# Altium PCB Power Selection.PcbDoc (part 2 of 2)
Units mm, origin at the board's own origin, x right, y up, seen from the top; angles counter-clockwise.
Board outline 152.4 x 101.6 mm, 4 copper layers (Top Layer, Ground, Signal, Bottom Layer), stack 0.777 mm thick; 134 components, 65 nets, 477 pads, 42 vias.
Unrouted connection lines stored in the file: 244.
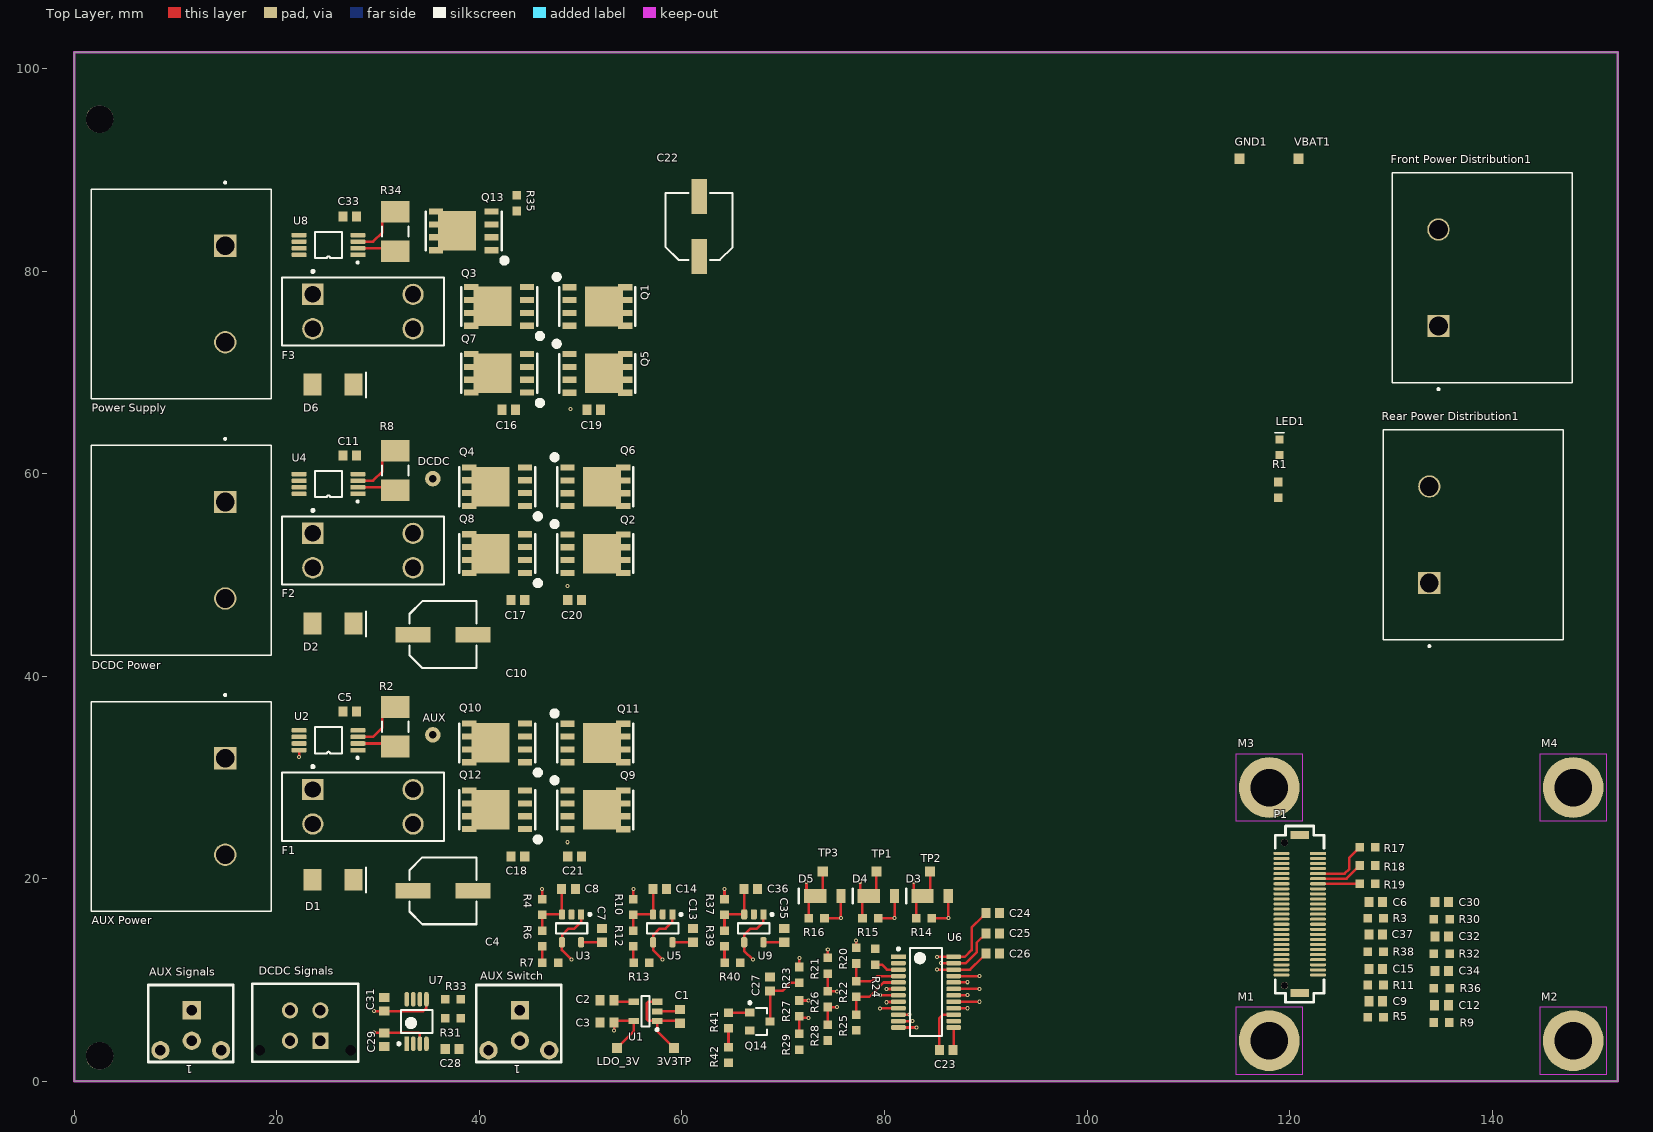
[diagram p0: Top Layer view]

## Part data (continued)
R27: "44.2 kOhms ±1% 0.1W, 1/10W Chip Resistor 0603 (1608 Metric) Automotive AEC-Q200 Thick Film", Power (Watts)=1/10W, Resistance="44.2 k", Supplier Part Number 1=P44.2KHCT-ND, ComponentLink1Description=https://industrial.panasonic.com/cdbs/www-data/pdf/RDA0000/AOA0000C304.pdf, ComponentLink1URL=https://industrial.panasonic.com/cdbs/www-data/pdf/RDA0000/AOA0000C304.pdf, Supplier 1=Digi-Key
R28: "76.8 kOhms ±1% 0.1W, 1/10W Chip Resistor 0603 (1608 Metric) Automotive AEC-Q200 Thick Film", Power (Watts)=1/10W, Resistance="76.8 k", Supplier Part Number 1=RMCF0603FT76K8CT-ND, ComponentLink1Description=https://www.seielect.com/catalog/sei-rmcf_rmcp.pdf, ComponentLink1URL=https://www.seielect.com/catalog/sei-rmcf_rmcp.pdf, Supplier 1=Digi-Key
R41: library part CMP-010-0039-1, "1 kOhms ��0.1% 0.1W, 1/10W Chip Resistor 0603 (1608 Metric) Automotive AEC-Q200 Thin Film", Case Code (Metric)=1608, Case/Package=0603, Manufacturer=Panasonic, Manufacturer Part Number=ERA3AEB103V, Max Operating Temperature=155��C, Max Power Dissipation=100mW, Min Operating Temperature=-55��C, Package Quantity=5000, Temperature Coefficient=25ppm/��C, Tolerance=0.1%, Voltage Rating=75V, ComponentLink1Description=Digikey, ComponentLink1URL=https://www.digikey.ca/product-detail/en/panasonic-electronic-components/ERA-3AEB102V/P1.0KDBCT-ND/1466052, ComponentLink2Description=http://www.farnell.com/datasheets/485442.pdf, ComponentLink2URL=http://www.farnell.com/datasheets/485442.pdf, ComponentLink3Description=http://industrial.panasonic.com/www-data/pdf/AOA0000/AOA0000CE26.pdf, ComponentLink3URL=http://industrial.panasonic.com/www-data/pdf/AOA0000/AOA0000CE26.pdf, ComponentLink4Description=http://www.farnell.com/datasheets/2052875.pdf, ComponentLink4URL=http://www.farnell.com/datasheets/2052875.pdf, ComponentLink5Description=http://www.farnell.com/datasheets/1776116.pdf, ComponentLink5URL=http://www.farnell.com/datasheets/1776116.pdf, ComponentLink6Description=http://uk.rs-online.com/webdocs/148c/0900766b8148c4ab.pdf, ComponentLink6URL=http://uk.rs-online.com/webdocs/148c/0900766b8148c4ab.pdf, ComponentLink7Description=http://www.farnell.com/datasheets/2059650.pdf, ComponentLink7URL=http://www.farnell.com/datasheets/2059650.pdf, ComponentLink8Description=http://www.produktinfo.conrad.com/datenblaetter/450000-474999/451250-da-01-en-WIDERSTAND_0603_ERA.pdf, ComponentLink8URL=http://www.produktinfo.conrad.com/datenblaetter/450000-474999/451250-da-01-en-WIDERSTAND_0603_ERA.pdf, Composition="Metal Film,Thin Film", Contact Plating=Tin, Depth=0.8mm, Design Item ID="RES SMD 1K OHM 0.1% 1/10W 0603", Height=0.45mm, Lead Free="Lead Free", Length=1.6mm, Military Standard=Not, Mount="Surface Mount", Number of Terminations=2, Packaging="Tape and Reel", Pins=2, Power Rating=100mW, Pricing 1="1 = 0.35000, 10 = 0.30000, 100 = 0.11720, 1000 = 0.04906, 2500 = 0.04498 (USD)", Radiation Hardening=No, REACH SVHC="No SVHC", RoHS=Yes, Source="Schematic Diagrams.SchLib", Stock 1=2747820, Termination=SMD/SMT, Voltage Rating (DC)=75V, Width=0.8mm
U1: "Linear Voltage Regulator IC 1 Output 200mA SOT-23-5", Supplier Part Number 1=296-12159-1-ND, ComponentLink1Description=https://media.digikey.com/pdf/Data%20Sheets/Texas%20Instruments%20PDFs/TPS793_Rev2015.pdf, ComponentLink1URL=https://media.digikey.com/pdf/Data%20Sheets/Texas%20Instruments%20PDFs/TPS793_Rev2015.pdf, Supplier 1=Digi-Key
U2 U4 U8: library part "IC CURRENT AMPLIFIER INA240 8-TSSOP", "Current Sense Amplifier 1 Circuit 8-TSSOP", Current - Supply=1.8mA, Manufacturer 1="Texas Instruments", Manufacturer Part Number 1=INA240A3PWR, Operating Temperature="-40°C ~ 125°C", Package / Case="8-TSSOP (0.173\", 4.40mm Width)", Supplier Device Package=8-TSSOP, Supplier Part Number 1=296-45090-1-ND, Voltage - Supply, Single/Dual (±)="2.7 V ~ 5.5 V", Amplifier Type="Current Sense", Category="Integrated Circuits (ICs)", ComponentLink1Description=http://www.ti.com/lit/ds/symlink/ina240.pdf, ComponentLink1URL=http://www.ti.com/lit/ds/symlink/ina240.pdf, Description 1="IC AMP CURRENT SENSE 8-TSSOP", Mounting Type="Surface Mount", Output Type=-, Packaging="Cut Tape (CT)", Part Status=Active, Pricing 1="1=3.79, 10=3.397, 100=2.7311, 500=2.24388, 1000=1.85921 (CAD)", RoHS="RoHS Compliant", Slew Rate="2 V/µs", Stock 1=1286, Supplier 1=Digi-Key
U3 U5 U9: "General Purpose Amplifier 1 Circuit Rail-to-Rail SOT-23-5", Current - Output / Channel=50mA, Current - Supply=400µA, Manufacturer 1="Texas Instruments", Manufacturer Part Number 1=TLV316QDBVRQ1, Operating Temperature="-40°C ~ 125°C", Package / Case="SC-74A, SOT-753", Supplier Device Package=SOT-23-5, Supplier Part Number 1=296-45323-1-ND, Voltage - Supply, Single/Dual (±)="1.8 V ~ 5.5 V, ±0.9 V ~ 2.75 V", -3db Bandwidth=-, Amplifier Type="General Purpose", Category="Integrated Circuits (ICs)", ComponentLink1Description=http://www.ti.com/lit/ds/symlink/tlv316-q1.pdf, ComponentLink1URL=http://www.ti.com/lit/ds/symlink/tlv316-q1.pdf, Description 1="IC OP AMP GP RR 10MHZ 5-SOT-23", Mounting Type="Surface Mount", Number of Circuits=1, Output Type=Rail-to-Rail, Packaging="Cut Tape (CT)", Part Status=Active, Pricing 1="1=1.33, 10=1.185, 100=0.9234, 500=0.76276, 1000=0.60218 (CAD)", RoHS="RoHS Compliant", Slew Rate="6 V/µs", Stock 1=1747, Supplier 1=Digi-Key
U6: "OR Controller Source Selector Switch P-Channel 3:1 24-SSOP", Current - Output (Max)=-, Current - Supply=28µA, Manufacturer 1="Linear Technology", Manufacturer Part Number 1=LTC4417CGN#PBF, Operating Temperature="0°C ~ 70°C", Package / Case="24-SSOP (0.154\", 3.90mm Width)", Supplier Device Package=24-SSOP, Supplier Part Number 1=LTC4417CGN#PBF-ND, Voltage - Supply="2.5 V ~ 36 V", ComponentLink1Description=http://www.linear.com/docs/42408, ComponentLink1URL=http://www.linear.com/docs/42408, FET Type=P-Channel, Internal Switch(s)=No, Mounting Type="Surface Mount", Packaging=Tube, Part Status=Active, Ratio - Input:Output=3:1, Supplier 1=Digi-Key, Type="Source Selector Switch"
U7: "General Purpose Amplifier 2 Circuit Rail-to-Rail 8-VSSOP", Case/Package=VSSOP, Input Bias Current=5pA, Input Offset Voltage (Vos)=250uV, Manufacturer="Texas Instruments", Manufacturer Part Number=OPA2197IDGKR, Max Operating Temperature=125°C, Min Operating Temperature=-40°C, Operating Supply Current=1mA, Output Current per Channel=65mA, Supplier Part Number 1=296-47349-1-ND, ComponentLink1Description=http://www.ti.com/lit/ds/symlink/opa2197.pdf, ComponentLink1URL=http://www.ti.com/lit/ds/symlink/opa2197.pdf, Gain Bandwidth Product=10MHz, Lead Free="Lead Free", Mount="Surface Mount", Number of Channels=2, Number of Circuits=2, Packaging="Tape and Reel", Pricing 1="1=2.41, 10=2.162, 100=1.7376, 500=1.4276, 1000=1.1829 (USD)", Slew Rate=20V/µs, Stock 1=2171, Supplier 1=Digi-Key

## Free pads (board coordinates)
  round 2.7 hole 2.7: ""(2.5,2.5) ""(2.5,95)

## Via types
v1: diameter 0.4, hole 0.2, Top Layer to Bottom Layer, tented both sides, 25 vias
v2: diameter 0.4, hole 0.2, Top Layer to Bottom Layer, 17 vias

## Nets (pads, with @x,y where several pads share a name; then routed paths per layer and width w, separated by ;. In a path a pad name is that pad's centre, name@x,y a point inside that pad or via, vN(x,y) a via of type N, cw(c..) or ccw(c..) an arc to the next point about the centre after c; other vN are vias at no path point)
3V3: 3V3TP.TP C1.1 P1.40 P1.41 P1.42 P1.43 P1.44 P1.45 R17.1 R18.1 R19.1 U1.1 U1.3 | length 9.4
  Top Layer w0.254: U1.3 56.698,7.852 56.549,7.703 56.549,6.1 56.698,5.952 U1.1 ; 3V3TP.TP 57.55,4.95 U1.1 ; C1.1 59.573,5.952 U1.1
AUX_BAT_IN: "AUX Power.1" D1.1 F1.1 F1.2 R4.1 | length 26.3
  Top Layer w0.254: R4.1 v1(46.2,19)
  Signal w0.254: F1.2 29.95,19 v1(46.2,19)
AUX_FUSED: AUX.TH_TP C26.1 Q10.5 Q10.6 Q10.7 Q10.8 Q12.5 Q12.6 Q12.7 Q12.8 R2.2 R23.1 U2.3 U6.22 | length 26
  Top Layer w0.254: U2.3 29.5,34 30.427,34.927 30.427,36.002 31.375,36.95 R2.2 ; R23.1 v1(71.6,12.175) ; v1(85.2,11.019) 86.797,11.019 U6.22@86.8,11.022 ; U6.22 88.448,11.022 89.652,12.227 89.702,12.227 90.025,12.55 C26.1
  Signal w0.254: v1(71.6,12.175) 80.525,12.175 81.681,11.019 v1(85.2,11.019)
DCDC_FUSED: C25.1 DCDC.TH_TP Q4.5 Q4.6 Q4.7 Q4.8 Q8.5 Q8.6 Q8.7 Q8.8 R8.2 R21.1 U4.3 U6.23 | length 24.4
  Top Layer w0.254: U4.3 29.5,59.3 30.427,60.227 30.427,61.302 31.375,62.25 R8.2 ; R21.1 v1(74.4,13.025) ; v2(85.6,11.657) 88.031,11.657 89.1,12.727 89.1,13.675 C25.1
  Signal w0.254: v1(74.4,13.025) 80.827,13.025 82.195,11.657 v2(85.6,11.657)
DCDC_UNFUSED: "DCDC Power.1" D2.1 F2.1 F2.2 R10.1 | length 60.2
  Top Layer w0.254: R10.1 v1(55.2,19)
  Signal w0.254: F2.2 25.2,49.05 25.2,24.4 30,19.6 46.422,19.6 47.022,19 v1(55.2,19)
GND: "AUX Power.2" "AUX Switch.2" "DCDC Power.2" "DCDC Signals.2" "Front Power Distribution1.2" "Power Supply.2" "Rear Power Distribution1.2" C1.2 C2.2 C3.2 C4.2 C5.2 C6.2 C7.2 C8.2 C9.2 C10.2 C11.2 C12.2 C13.2 C14.2 C15.2 C16.2 C17.2 C18.2 C22.2 C23.2 C24.2 C25.2 C26.2 C27.2 C28.2 C29.2 C30.2 C31.2 C32.2 C33.2 C34.2 C35.2 C36.2 C37.2 D1.2 D2.2 D6.2 GND1.TP LED1.2 P1.1 P1.2 P1.3 P1.4 P1.26 P1.27 P1.28 P1.29 Q14.2 R7.2 R13.2 R24.2 R25.1 R28.2 R29.2 R31.2 R33.2 R35.2 R40.2 R42.2 U1.2 U2.1 U2.4 U2.6 U2.7 U3.2 U4.1 U4.4 U4.6 U4.7 U5.2 U6.13 U7.4 U8.1 U8.4 U8.6 U8.7 U9.2 | length 4.6
  Top Layer w0.254: U1.2 57.552,6.9 59.625,6.9 C1.2 ; C23.2 86.825,3.15 U6.13
LDO_3V: "AUX Signals.2" "DCDC Signals.1" C3.1 C5.1 C7.1 C11.1 C13.1 C28.1 C33.1 C35.1 LDO_3V.TP U1.5 U2.5 U3.5 U4.5 U5.5 U7.8 U8.5 U9.5 | length 12.3
  Top Layer w0.254: U3.5 C7.1 ; v2(53.3,5) 53.3,5.775 C3.1 53.427,5.952 U1.5 55.25,4.95 LDO_3V.TP ; U5.5 C13.1 ; U9.5 C35.1
"NetAUX Signals_1": "AUX Signals.1" C31.1 R33.1 U7.5 | length 25.5
  Top Layer w0.254: v2(29.6,6.925) C31.1 34.443,6.925 34.766,7.249 34.766,8.091 U7.5
  Signal w0.254: 11.6,7 13.2,8.6 27.925,8.6 v2(29.6,6.925)
"NetAUX Switch_1": "AUX Switch.1" R41.1 R42.1 | length 1.9
  Top Layer w0.254: R42.1 R41.1
NetC2_1: C2.1 U1.4 | length 2
  Top Layer w0.254: C2.1 53.423,7.852 U1.4
NetC4_1: C4.1 F1.3 F1.4 R2.1 U2.2 | length 3.8
  Top Layer w0.254: U2.2 31.4,33.35 R2.1
NetC8_1: C8.1 R4.2 R6.1 U3.3 | length 6.1
  Top Layer w0.254: R6.1 R4.2 46.25,16.475 U3.3 48.15,18.975 C8.1
NetC10_1: C10.1 F2.3 F2.4 R8.1 U4.2 | length 3.8
  Top Layer w0.254: U4.2 31.4,58.65 R8.1
NetC14_1: C14.1 R10.2 R12.1 U5.3 | length 6.1
  Top Layer w0.254: R12.1 R10.2 55.25,16.475 U5.3 57.15,18.975 C14.1
NetC27_1: C27.1 Q14.3 R23.2 R27.1 U6.8 | length 17
  Top Layer w0.254: Q14.3 C27.1 69.925,8.925 70.725,9.725 R23.2 ; R27.1 v1(72.5,7.975) ; v1(80.184,7.8) 80.208,7.824 81.326,7.824 U6.8@81.35,7.847
  Signal w0.254: v1(72.5,7.975) 72.525,7.975 73.756,6.744 75.541,6.744 76.597,7.8 v1(80.184,7.8)
NetC29_1: "DCDC Signals.3" C29.1 R31.1 U7.3 | length 14.7
  Top Layer w0.254: v2(29.6,4.8) 33.976,4.8 34.125,4.651 U7.3
  Signal w0.254: 21.3,4 22.8,5.5 28.9,5.5 v2(29.6,4.8)
NetC36_1: C36.1 R37.2 R39.1 U9.3 | length 6.1
  Top Layer w0.254: R39.1 R37.2 64.25,16.475 U9.3 66.15,18.975 C36.1
NetD3_1: D3.1 R14.2 U6.20 | length 12.3
  Top Layer w0.254: R14.2 v1(86.3,16.1) D3.1 ; U6.20 86.849,9.776 v2(88.2,9.776)
  Signal w0.254: v1(86.3,16.1) 88.2,14.2 v2(88.2,9.776)
NetD4_1: D4.1 R15.2 U6.18 | length 18.3
  Top Layer w0.254: R15.2 v2(81,16.1) D4.1 ; U6.18 86.834,8.491 88.191,8.491 v2(88.2,8.5) v2@88.276,8.5
  Signal w0.254: v2(81,16.1) 85.1,16.1 87.6,13.6 87.6,9.1 v2(88.2,8.5)
NetD5_1: D5.1 R16.2 U6.16 | length 24.2
  Top Layer w0.254: R16.2 v1(75.7,16.1) D5.1 ; U6.16 86.831,7.206 v2(88.2,7.206)
  Signal w0.254: v1(75.7,16.1) 79.8,16.1 80.5,15.4 84.8,15.4 87.1,13.1 87.1,8.306 v2(88.2,7.206)
NetF3_3: F3.3 F3.4 R34.1 U8.2 | length 3.8
  Top Layer w0.254: U8.2 31.4,82.25 R34.1
NetLED1_1: LED1.1 R1.2
NetQ13_4: Q13.4 R35.1
NetQ13_5: Q13.5 Q13.6 Q13.7 Q13.8 R34.2 U8.3 | length 5.6
  Top Layer w0.254: U8.3 29.5,82.9 30.427,83.827 30.427,84.902 31.375,85.85 R34.2
NetQ14_1: Q14.1 R41.2 | length 2.1
  Top Layer w0.254: R41.2 66.675,6.775 Q14.1
NetR3_1: R3.1 U2.8 | length 0.7
  Top Layer w0.254: v1(22.2,32) U2.8
NetR5_1: R5.1 U3.1 U3.4 | length 47.6
  Top Layer w0.254: v1(49.1,12) 48.15,12.95 U3.4 48.182,13.757 48.182,14.436 48.821,15.075 49.378,15.075 50.046,15.743 50.046,16.471 U3.1
  Signal w0.254: v1(49.1,12) 55.5,12 57.5,10 80.6,10 81.7,8.9 87.2,3.4
NetR6_2: R6.2 R7.1 | length 1.6
  Top Layer w0.254: R6.2 46.2,11.725 R7.1
NetR9_1: R9.1 U4.8
NetR11_1: R11.1 U5.1 U5.4 | length 37.7
  Top Layer w0.254: v1(58.1,12) 57.15,12.95 U5.4 57.171,13.746 57.171,14.446 57.8,15.075 58.375,15.075 59.043,15.743 59.043,16.468 U5.1
  Signal w0.254: v1(58.1,12) 64.47,12 65.67,10.8 80.526,10.8 86.726,4.6
NetR12_2: R12.2 R13.1 | length 1.6
  Top Layer w0.254: R12.2 55.2,11.725 R13.1
NetR20_2: R20.2 R22.1 U6.4 | length 6.1
  Top Layer w0.254: R20.2 R22.1 77.2,9.875 78.775,9.875 79.287,10.387 U6.4
NetR21_2: R21.2 R26.1 U6.6 | length 8.8
  Top Layer w0.254: R21.2 R26.1 v1(75.3,8.875) ; v1(80.179,9.104) 80.184,9.109 81.341,9.109 U6.6@81.35,9.117
  Signal w0.254: v1(75.3,8.875) 75.529,9.104 v1(80.179,9.104) 80.192,9.104 v1@80.204,9.104
NetR22_2: R22.2 R25.2 U6.5 | length 6.5
  Top Layer w0.254: R25.2 R22.2@77.2,8.325 ; R22.2 R22.2@77.2,8.325 ; U6.5 79.922,9.752 78.495,8.325 R22.2@77.2,8.325
NetR24_1: R24.1 U6.3 | length 2.5
  Top Layer w0.254: R24.1 79.74,11.517 80.235,11.022 U6.3
NetR26_2: R26.2 R28.1 U6.7 | length 9.2
  Top Layer w0.254: R28.1 R26.2 v1(75.3,7.325) ; v1(79.575,8.5) 79.584,8.491 81.341,8.491 U6.7@81.35,8.482
  Signal w0.254: v1(75.3,7.325) 76.475,8.5 v1(79.575,8.5) 79.587,8.5 v1@79.6,8.5
NetR27_2: R27.2 R29.1 U6.9 | length 12
  Top Layer w0.254: R29.1 R27.2 71.769,6.256 v1(72.5,6.256) ; v1(79.575,7.2) 79.581,7.206 81.344,7.206 U6.9@81.35,7.212
  Signal w0.254: v1(72.5,6.256) 75.953,6.256 76.897,7.2 v1(79.575,7.2) 79.587,7.2 v1@79.6,7.2
NetR30_1: R30.1 U7.1 U7.2
NetR32_1: R32.1 U7.6 U7.7
NetR36_1: R36.1 U8.8
NetR38_1: R38.1 U9.1 U9.4 | length 28.4
  Top Layer w0.254: v1(67,12) 66.15,12.85 U9.4 66.15,14.45 66.775,15.075 67.4,15.075 68.05,15.725 U9.1
  Signal w0.254: v1(67,12) 70.953,12 71.553,11.4 80.5,11.4 86.621,5.279
NetR39_2: R39.2 R40.1 | length 1.6
  Top Layer w0.254: R39.2 64.2,11.725 R40.1
PA0_AUX_VSENSE: C9.1 P1.25 R5.2
PA1_DCDC_VSENSE: C15.1 P1.24 R11.2
PA2_PWR_SUP_VSENSE: C37.1 P1.23 R38.2
PA3_AUX_ISENSE: C6.1 P1.22 R3.2
PA4_DCDC_ISENSE: C12.1 P1.21 R9.2
PA5_PWR_SUP_ISENSE: C34.1 P1.20 R36.2
PA6_AUX_TEMP: C32.1 P1.19 R32.2
PA7_DCDC_TEMP: C30.1 P1.18 R30.2
PA8_EN: P1.32 U6.1
PA8_V\A\L\I\D\3\: P1.7 R19.2 U6.12 | length 5.9
  Top Layer w0.254: U6.12@81.354,5.304 83.171,5.304 v1(83.175,5.3) ; P1.7 R19.2
PA9_V\A\L\I\D\2\: P1.6 R18.2 U6.11 | length 6.1
  Top Layer w0.254: U6.11@81.35,5.942 v1(82.775,5.942) ; P1.6 125.625,20 R18.2
PA10_V\A\L\I\D\1\: P1.5 R17.2 U6.10 | length 7
  Top Layer w0.254: U6.10@81.35,6.577 v1(82.475,6.577) ; P1.5 125.425,20.5 125.9,20.975 125.9,22.075 R17.2
PB0_DCDC_FAULT: "DCDC Signals.4" P1.17
PB15_S\H\D\N\: P1.8 U6.2
"Power Supply_UNFUSED": "Power Supply.1" D6.1 F3.1 F3.2 R37.1 | length 92.4
  Top Layer w0.254: R37.1 v1(64.2,19)
  Signal w0.254: F3.2 25.7,72.15 25.7,24.6 30.294,20.006 55.294,20.006 56.3,19 v1(64.2,19)
POWER_SUPLLY_FUSED: C24.1 Q3.5 Q3.6 Q3.7 Q3.8 Q7.5 Q7.6 Q7.7 Q7.8 Q13.1 Q13.2 Q13.3 R20.1 U6.24 | length 17.4
  Top Layer w0.254: R20.1 77.089,13.288 77.2,13.399 v1(77.2,13.9) ; v1(85.193,12.285) 85.2,12.292 U6.24 87.939,12.292 88.6,12.953 88.6,15.175 89.652,16.227 89.702,16.227 90.025,16.55 C24.1
  Signal w0.254: v1(77.2,13.9) 81.1,13.9 82.708,12.292 85.186,12.292 v1(85.193,12.285)
VBAT: "Front Power Distribution1.1" "Rear Power Distribution1.1" C19.2 C20.2 C21.2 C22.1 C23.1 P1.47 P1.48 P1.49 P1.50 Q1.5 Q1.6 Q1.7 Q1.8 Q2.5 Q2.6 Q2.7 Q2.8 Q5.5 Q5.6 Q5.7 Q5.8 Q6.5 Q6.6 Q6.7 Q6.8 Q9.5 Q9.6 Q9.7 Q9.8 Q11.5 Q11.6 Q11.7 Q11.8 R1.1 U6.15 VBAT1.TP | length 4.7
  Top Layer w0.254: C23.1 85.425,6.225 85.777,6.577 U6.15
VG_1: C19.1 D3.2 Q1.4 Q3.4 Q5.4 Q7.4 R14.1 TP2.TP | length 82.3
  Top Layer w0.254: v2(82.9,19.7) 82.9,18.873 83.473,18.3 D3.2 ; R14.1 83.125,17.675 D3.2 ; TP2.TP 84.5,18.873 83.927,18.3 D3.2
  Signal w0.254: v2(49,66.4) 49,49.788 49.3,49.488 49.3,28.722 53.322,24.7 77.9,24.7 v2(82.9,19.7)
VG_2: C20.1 D4.2 Q2.4 Q4.4 Q6.4 Q8.4 R15.1 TP1.TP | length 60.1
  Top Layer w0.254: v2(77.6,19.7) 77.6,18.873 78.173,18.3 D4.2 ; R15.1 77.825,17.675 D4.2 ; TP1.TP 79.2,18.873 78.627,18.3 D4.2
  Signal w0.254: v2(48.691,48.888) 48.691,28.609 53.1,24.2 73.1,24.2 v2(77.6,19.7)
VG_3: C21.1 D5.2 Q9.4 Q10.4 Q11.4 Q12.4 R16.1 TP3.TP | length 32.4
  Top Layer w0.254: v2(72.3,19.7) 72.3,18.873 72.873,18.3 D5.2 ; R16.1 72.525,17.675 D5.2 ; TP3.TP 73.9,18.873 73.327,18.3 D5.2
  Signal w0.254: v2(48.7,23.6) 68.4,23.6 v2(72.3,19.7)
VS_1: C16.1 Q1.1 Q1.2 Q1.3 Q3.1 Q3.2 Q3.3 Q5.1 Q5.2 Q5.3 Q7.1 Q7.2 Q7.3 U6.21 | length 109.8
  Top Layer w0.254: U6.21 86.831,10.394 86.837,10.387 v2(89.4,10.387)
  Signal w0.254: 46.6,76.3 44.4,74.1 44.4,22.1 45.4,21.1 65.9,21.1 69.5,17.5 86.2,17.5 89.4,14.3 v2(89.4,10.387)
VS_2: C17.1 Q2.1 Q2.2 Q2.3 Q4.1 Q4.2 Q4.3 Q6.1 Q6.2 Q6.3 Q8.1 Q8.2 Q8.3 U6.19 | length 85.8
  Top Layer w0.254: U6.19 86.834,9.109 86.842,9.117 v2(89.4,9.117)
  Signal w0.254: 46,52.5 45.4,51.9 45.4,23.9 47.2,22.1 66.7,22.1 70.7,18.1 86.7,18.1 90.1,14.7 90.1,9.817 v2(89.4,9.117)
VS_3: C18.1 Q9.1 Q9.2 Q9.3 Q10.1 Q10.2 Q10.3 Q11.1 Q11.2 Q11.3 Q12.1 Q12.2 Q12.3 U6.17 | length 61.1
  Top Layer w0.254: U6.17 86.885,7.787 86.945,7.847 v2(89.4,7.847)
  Signal w0.254: 46.6,26.7 46.6,24.7 48.5,22.8 67.9,22.8 72,18.7 88.1,18.7 90.7,16.1 90.7,9.147 v2(89.4,7.847)
pads on no net: "AUX Signals.0" "AUX Switch.0" "DCDC Signals." M1. M2. M3. M4. P1. P1.9 P1.10 P1.11 P1.12 P1.13 P1.14 P1.15 P1.16 P1.30 P1.31 P1.33 P1.34 P1.35 P1.36 P1.37 P1.38 P1.39 P1.46 U6.14

## Polygon pours and split planes (outlines as drawn)
no net on Ground (split plane): 151.89,0.51 0.51,0.51 0.51,101.09 151.89,101.09

## Keep-outs
Keep-Out Layer:
  lines w0.254: 50.8,101.6 0,101.6 ; 0,101.6 0,0 152.4,0 152.4,101.6 0,101.6

## Text inside footprints (layer, text, board x,y; h text height)
"AUX Signals": Top Overlay "1" at 11.7,1.6 h0.8 r180
"AUX Switch": Top Overlay "1" at 44.1,1.6 h0.8 r180